# Altium PCB PCB_IOT.PcbDoc
Units mil, origin at the board's own origin, x right, y up, seen from the top; angles counter-clockwise.
Board outline 3937.01 x 3937.01 mil, 2 copper layers (Top Layer, Bottom Layer); 53 components, 41 nets, 184 pads, 0 vias.
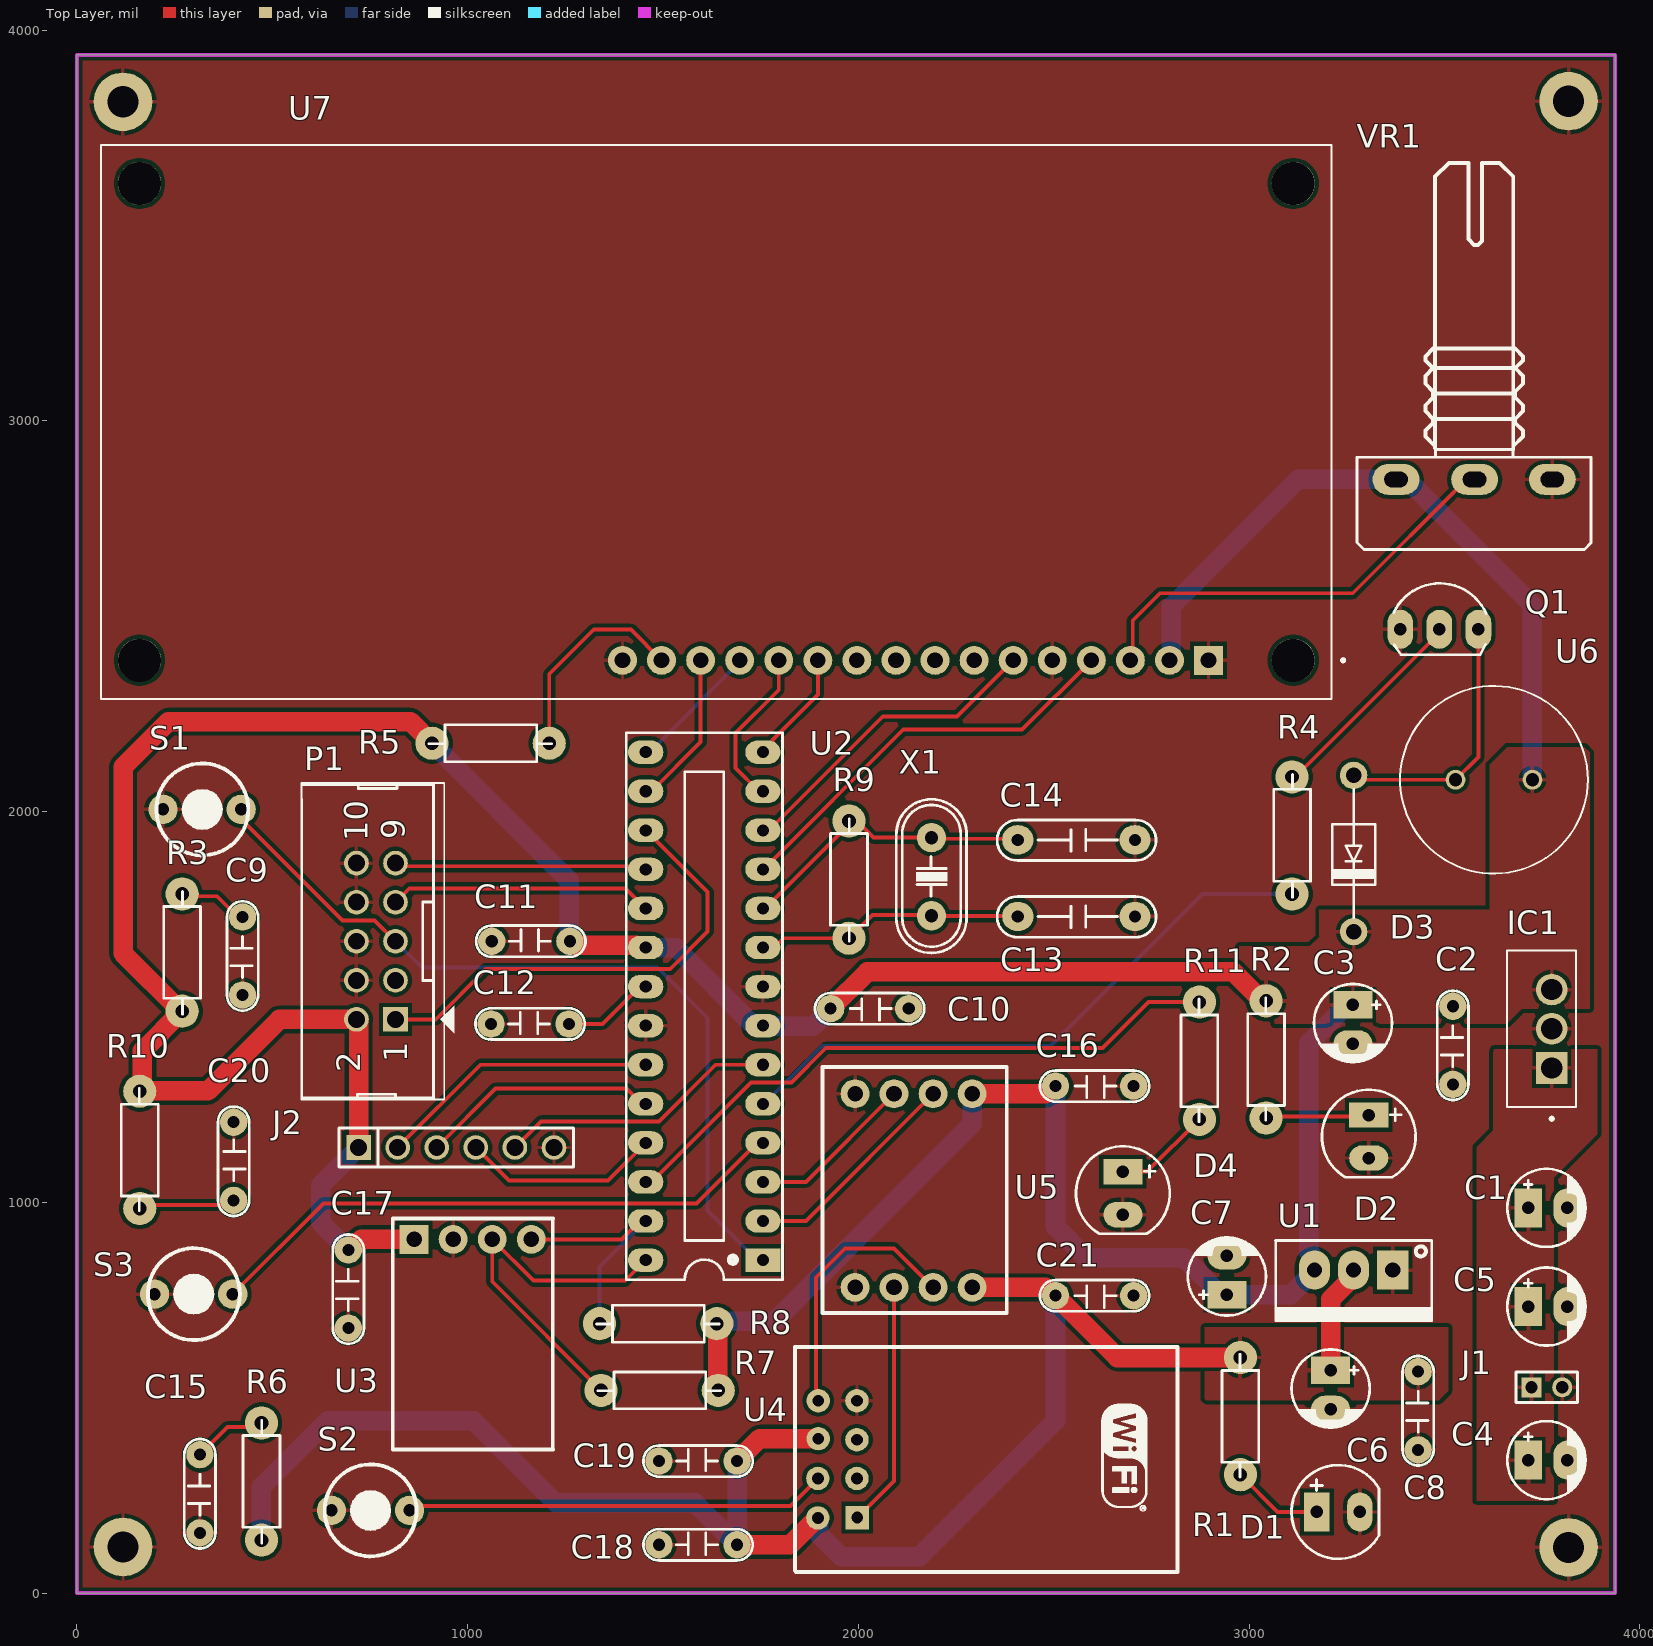
[diagram p0: Top Layer view]
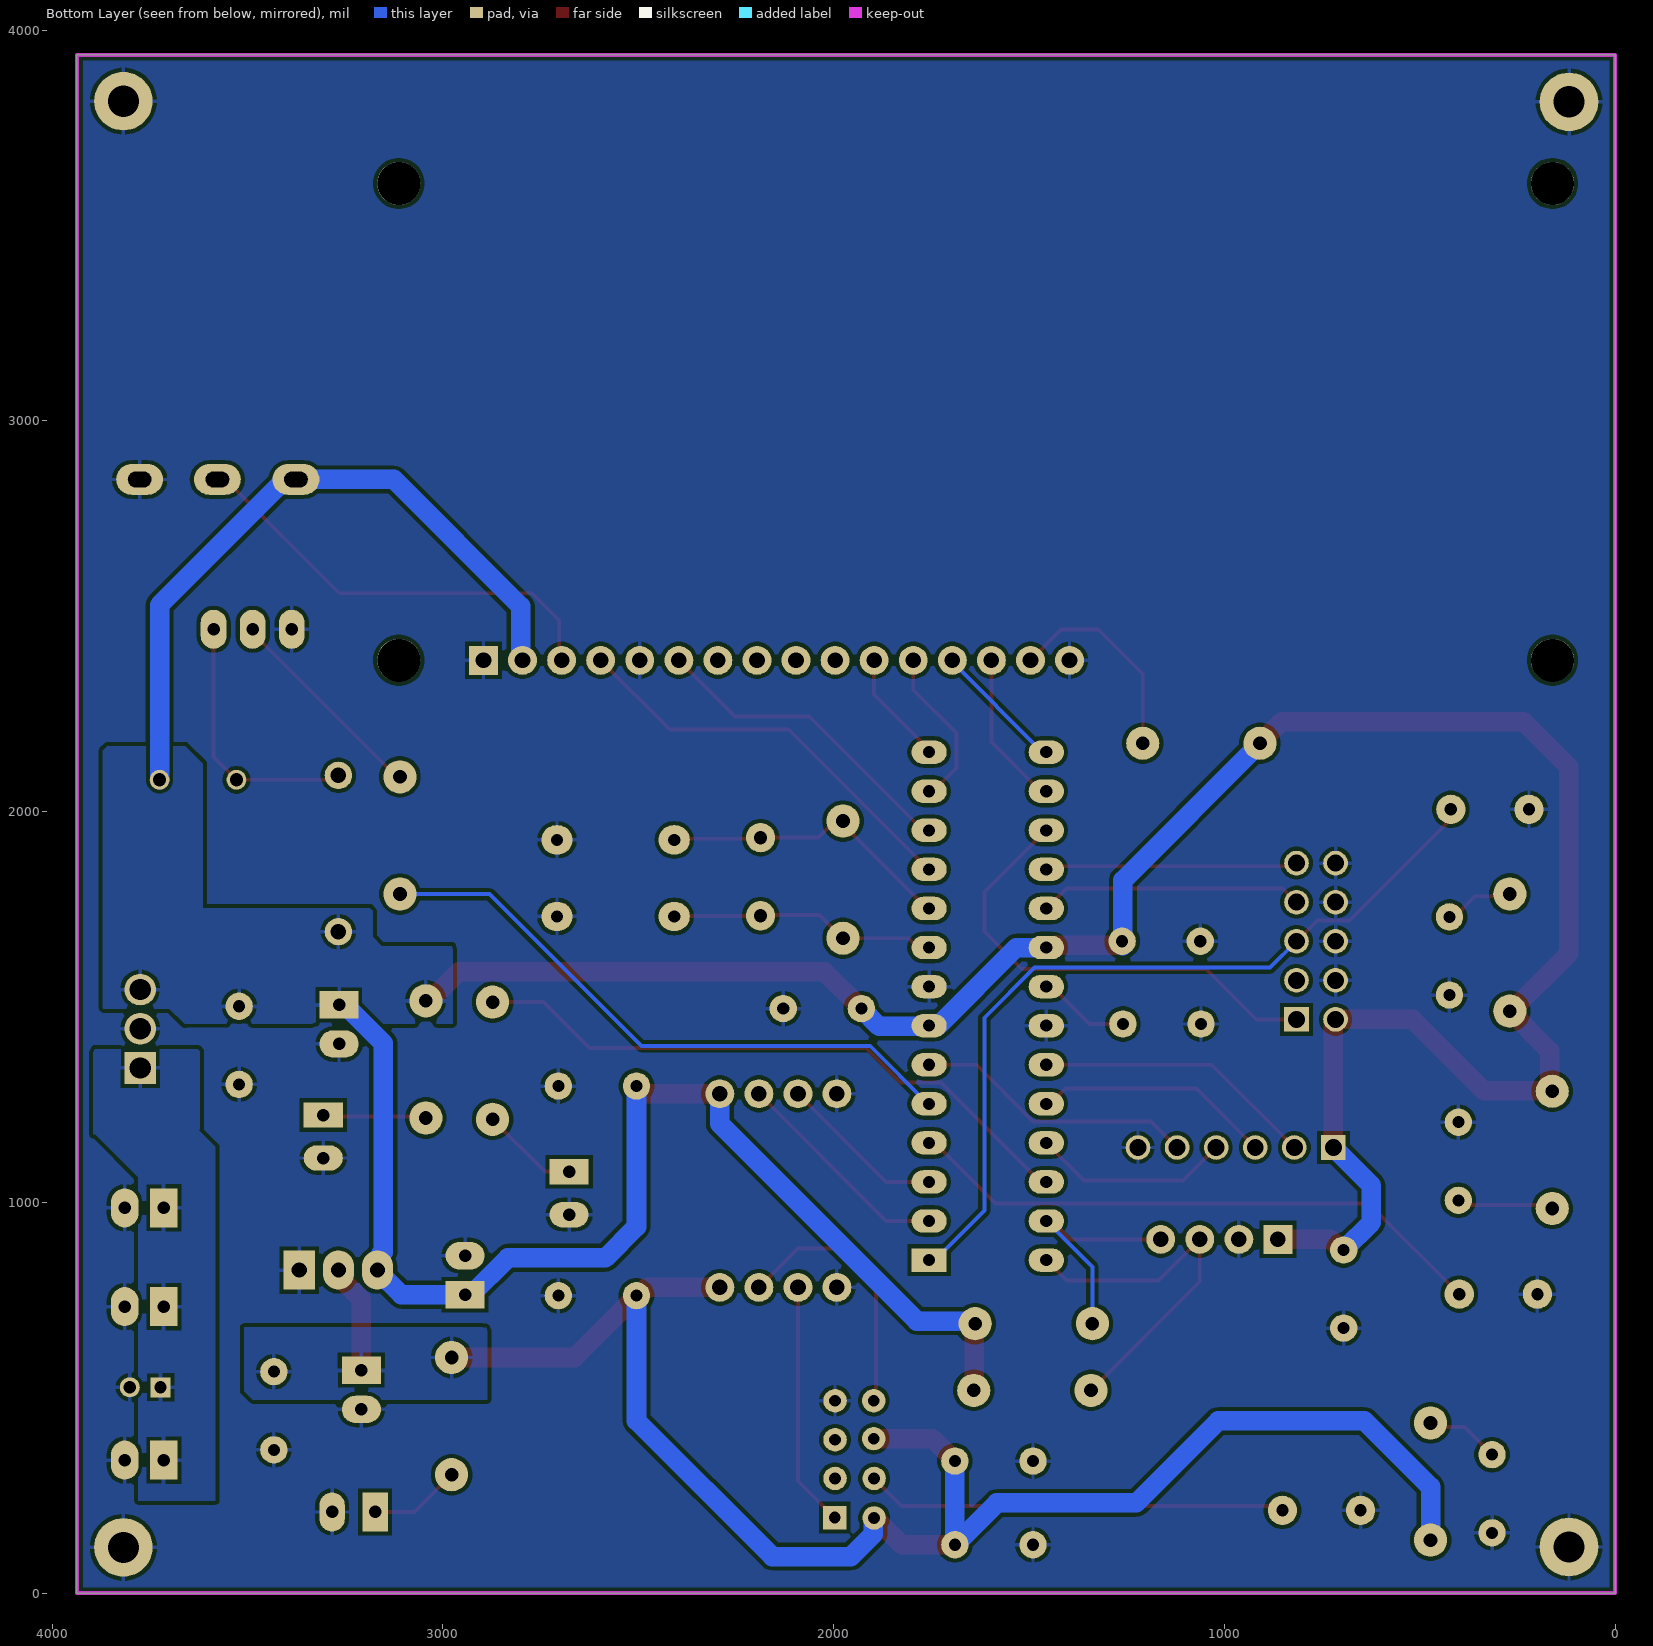
[diagram p1: Bottom Layer view, seen from below]
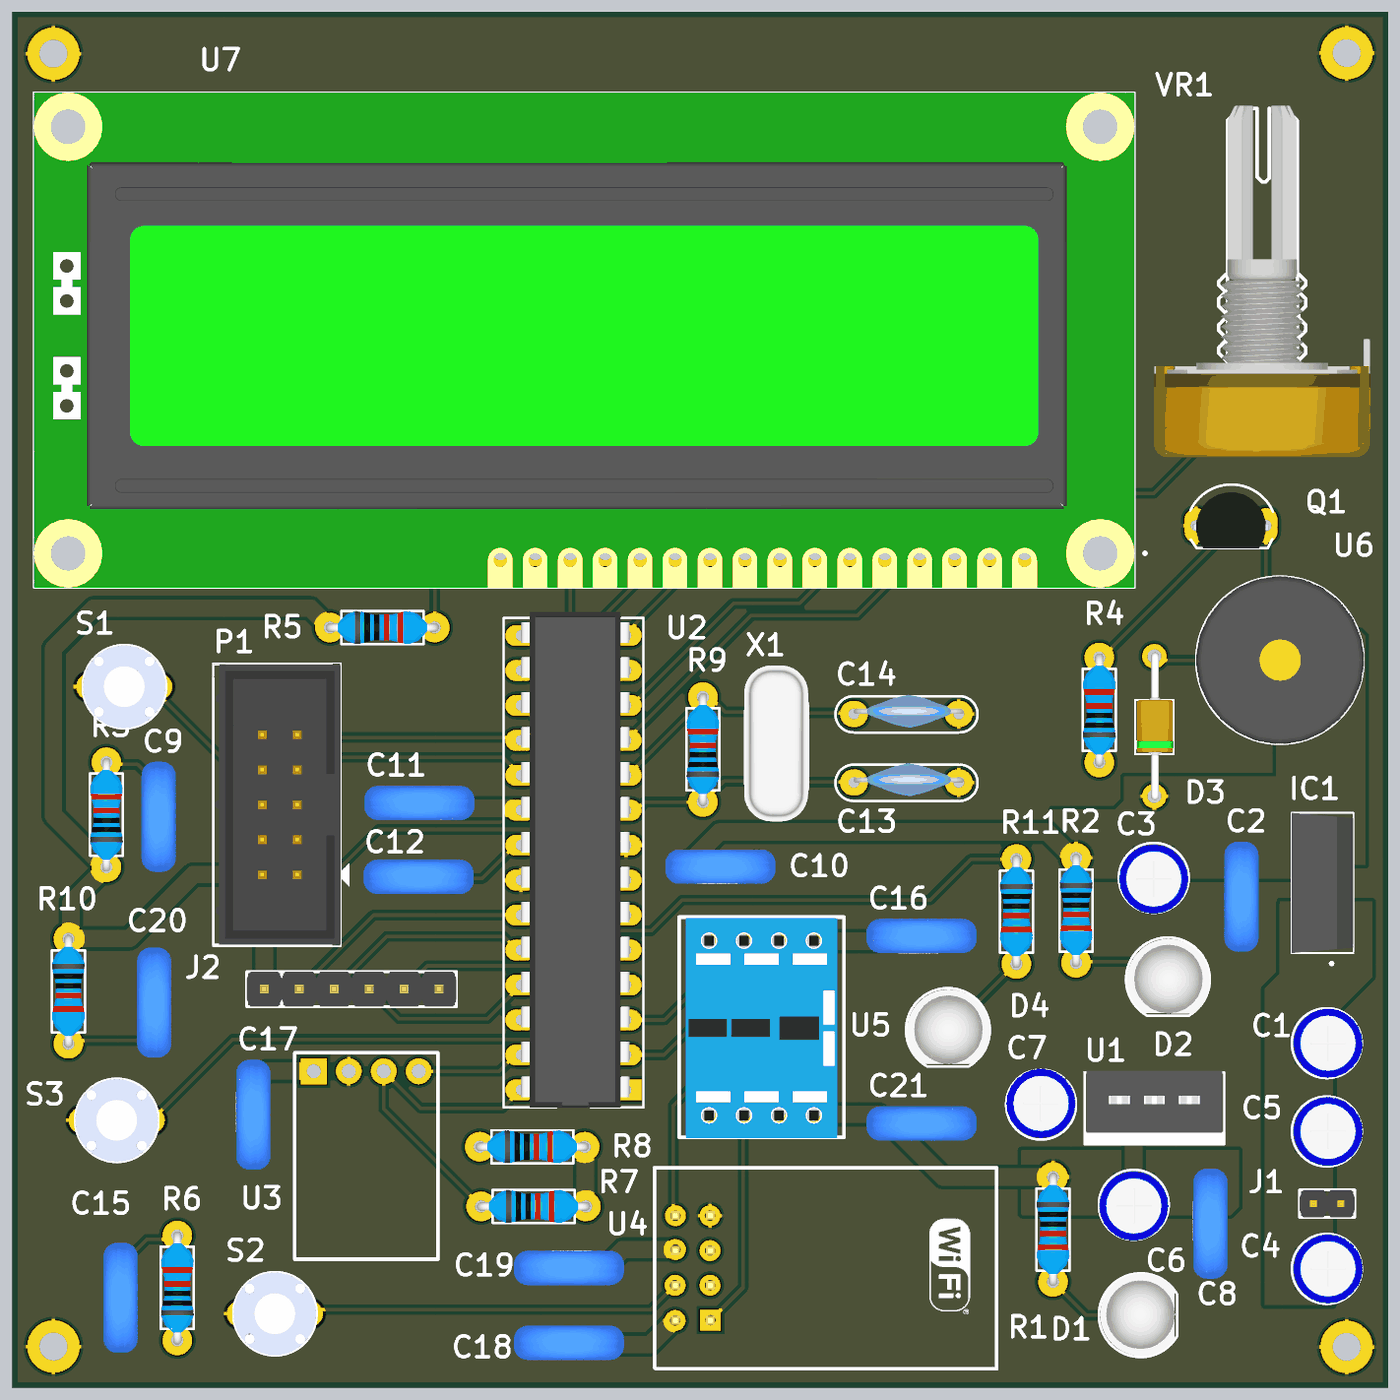
[diagram p2: 3D render of the assembled board from above, using the file's embedded part models]

## Layer stack, top to bottom
Top Solder: solder mask 0.4, Solder Resist, Dk 3.5
Top Layer: signal copper 1.4
Dielectric 1: dielectric 12.6, FR-4, Dk 4.8
Bottom Layer: signal copper 1.4
Bottom Solder: solder mask 0.4, Solder Resist, Dk 3.5

## Board outline
0,3937.01 3937.01,3937.01 3937.01,0 0,0

## Design rules (kind name [scope] priority, off if disabled: settings)
Clearance [All] p1: gap=10 ignorepadtopadclearanceinfootprint=FALSE
PolygonConnect [All] p1: connectstyle=Relief reliefconductorwidth=10 reliefentries=4 polygonreliefangle="90 Angle" airgapwidth=10
RoutingVias [All] p1: holewidth=11.81 width=19.68 viastyle="Through Hole" minholewidth=7.87 minwidth=15.75 maxholewidth=19.68 maxwidth=78.74
SolderMaskExpansion [All] p1: expansion=4 istentingtop=FALSE
SupplyNets "Schematic Supply Nets_3" [InNet('GND')] p1: voltage=0.000
SupplyNets "Schematic Supply Nets_2" [InNet('VIN')] p2: voltage=0.000
SupplyNets "Schematic Supply Nets_1" [InNet('+3.3')] p3: voltage=0.000
SupplyNets "Schematic Supply Nets" [InNet('VCC')] p4: voltage=0.000
UnRoutedNet UnRoutedNet_1 [All] p1: checkbadconnections=TRUE
UnRoutedNet [All] p2: checkbadconnections=TRUE
Width [All] p1: maxlimit=50 minlimit=10 preferedwidth=50 minimp=50.000000 maximp=50.000000 favimp=50.000000
29 further rules are at their usual default settings.

## Classes and differential pairs
component class sensor_wifi: 0 C15 C16 C18 C19 C21 R6 R7 R8 S2 U3 U4 U5
component class power_display: C1 C2 C3 C4 C5 C6 C7 C8 D1 D2 D3 IC1 J1 Q1 R1 R2 R4 R5 U1 U6 U7 VR1
component class MCU: C9 C10 C11 C12 C13 C14 C20 D4 J2 P1 R3 R9 R10 R11 S1 S3 U2 X1

## Components (designator, comment, footprint, x,y, rotation, side; value= is the part's Value field where it differs from the comment)
C1 "22µF/16V" CP1/2 3714.57,986.01 r0 top value=47µF/35V
C2 "0.1uF" CN2 3521.75,1302.01 r90 top
C3 "10µF/16V" CP1/2 3266.09,1505.58 r270 top value=47µF/35V
C4 "47µF/35V" CP1/2 3714.57,340.3 r0 top
C5 "47µF/35V" CP1/2 3714.57,733.37 r0 top
C6 "10µF/16V" CP1/2 3208.86,570.3 r270 top value=47µF/35V
C7 "22µF/16V" CP1/2 2943.52,763.6 r90 top value=47µF/35V
C8 "0.1uF" CN2 3432.81,366.73 r90 top
C9 "0.1uF" CN2 424.07,1530.67 r90 top
C10 "0.1uF" CN2 2129.13,1496.06 r180 top
C11 "0.1uF" CN2 1061.72,1668.44 r0 top
C12 "0.1uF" CN2 1059.84,1456.69 r0 top
C13 "22pF" CN3 2408.17,1731.9 r0 top value=0,047uF
C14 "22pF" CN3 2408.17,1927.82 r0 top value=0,047uF
C15 "0.1uF" CN2 314.96,154.33 r90 top
C16 "0.1uF" CN2 2704.69,1297.79 r180 top
C17 "0.1uF" CN2 694.69,678.23 r90 top
C18 "0.1uF" CN2 1489.78,123.66 r0 top
C19 "0.1uF" CN2 1489.78,337.96 r0 top
C20 "0.1uF" CN2 401.17,1205.29 r270 top
C21 "0.1uF" CN2 2704.69,761.29 r180 top
D1 "GREEN" LED-5TRED 3228.86,207.72 r0 top
D2 "GREEN" LED-5TRED 3306.52,1168.6 r270 top
D3 "Diode" DIO-1A 3267.72,2092.91 r270 top value=1N5007
D4 "GREEN" LED-5TRED 2677.17,1023.62 r270 top
IC1 "L7805" L7805 3750.31,1205.82 r90 top
J1 "12V/1A" J2-D1T 3762.14,526.74 r0 top
J2 "JP6" JP6-D1T 721.07,1140.5 r0 top
P1 "HD 5x2" 61201021621 765.51,1668.44 r90 top
Q1 "2N3904" TO92-123 3487.14,2466.85 r0 top value=C1815
R1 "1k" RES-1/4W-SMALL 2977.93,463.05 r270 top
R2 "1k" RES-1/4W-SMALL 3043.83,1376 r270 top
R3 "10k" RES-1/4W-SMALL 269.44,1629.51 r90 top
R4 "1K" RES-1/4W-SMALL 3110.24,1929.13 r90 top
R5 "220" RES-1/4W-SMALL 1048.99,2175.15 r0 top
R6 "10k" RES-1/4W-SMALL 472.44,275.59 r90 top
R7 "4.7k" RES-1/4W-SMALL 1481.53,518.92 r0 top
R8 "4.7k" RES-1/4W-SMALL 1477.83,689.62 r0 top
R9 "1M" RES-1/4W-SMALL 1976.09,1816.08 r90 top
R10 "10k" RES-1/4W-SMALL 160.86,1144.45 r270 top
R11 "680" RES-1/4W-SMALL 2872.99,1372.63 r270 top
S1 "RESET MCU" "BUTTON  ROUND" 320.52,2005.89 r180 top
S2 "RESET_WIFI" "BUTTON  ROUND" 751.45,211.78 r180 top
S3 "ALARM MUTE" "BUTTON  ROUND" 298.88,765.18 r180 top
U1 "LM1117-3.3V" TO220-123 3367.72,826.77 r180 top
U2 "ATmega328-PU" DIP28 1755.86,852.35 r90 top
U3 "AHT20" AHT20 808.52,958.41 r0 top
U4 "ESP8266 ESP-01" "ESP8266 ESP-01" 1836.57,629.42 r270 top
U5 "LOGIC LEVEL SHIFTER" "I2C LEVEL" 2379.91,716.6 r180 top
U6 "buzzer" buzzer 3663.2,2063.57 r180 top
U7 "LCD" LCD 1730.65,3163.28 r180 top
VR1 "10K" VR-S1 3576.35,2850.3 r180 top value="Volume 50k"
X1 "16MHz" XT2 2187.19,1833.62 r270 top value=32.768kHz

## Footprints (in the part's own frame and the unit in brackets; to place one, negate y for a bottom-side part, rotate by r counter-clockwise, add the part's x,y. Pads: shape width x height; smd on the part's side, far side on the other; paste and mask are expansions set on the pad)
61201021621 [mm] "10 pins, straight, gold plating"
  rect 1.6x1.6 hole 1.1: 1(-5.08,-1.27)
  round 1.6 hole 1.1: 2(-5.08,1.27) 3(-2.54,-1.27) 4(-2.54,1.27) 5(0,-1.27) 6(0,1.27) 7(2.54,-1.27) 8(2.54,1.27) 9(5.08,-1.27) 10(5.08,1.27)
  silkscreen extent -10.29,-5.08 10.29,4.85, body extent -10.18,-4.42 10.18,4.75, height 9.13
AHT20 [mil]
  rect 74x74 / inner round 74 / far side rect 74x74 hole 40: 1(54.47,-52.9)
  round 74 hole 40: 2(154.47,-52.9) 3(254.47,-52.9) 4(354.47,-52.9)
  silkscreen extent 0,-591 410,0
"BUTTON  ROUND" [mm]
  round 1.905 / inner round 1.524 / far side round 1.905 hole 0.8 mask+0.205: 1(-2.54,0) 2(2.54,0)
  silkscreen extent -3,-2.99 2.98,2.99, body extent -3,-3 3,3, height 4.5
buzzer [mm]
  round 1.28 hole 0.85: 1(-1.58,-0.461) 2(3.42,-0.461)
  silkscreen extent -5.18,-6.56 7.02,5.64, body extent -5.2,-6.57 7,5.63, height 6
CN2 [mil]
  round 70 hole 31: 1(0,0) 2(200,0)
  silkscreen extent -40,-40 240,40, body extent -54,-44 260,55, height 407
CN3 [mil] "Cap np W 0.3"
  oval 80x75 hole 31: 1(0,0) 2(300,0)
  silkscreen extent -53,-53 354,51, body extent 0,-39 315,55, height 419
CP1/2 [mil] "Tu hoa < 22uF/16>50V"
  rect 70x100 hole 32: 1(0,0)
  oval 70x100 hole 32: 2(100,0)
  silkscreen extent -53,-100 147,100, body extent -49,-99 149,99, height 287
DIO-1A [mil]
  round 70 hole 40: 1(0,0) 2(400,0)
  silkscreen extent 35,-55 365,55, body extent -11,-50 411,54, height 102
DIP28 [mil] "DIP, 18-Leads, Row Spacing 7.62mm, Pitch 2.54mm, Body 22.8x7.3mm, Window"
  rect 60x90 hole 31: 1(0,0)
  oval 60x90 hole 31: 2(100,0) 3(200,0) 4(300,0) 5(400,0) 6(500,0) 7(600,0) 8(700,0) 9(800,0) 10(900,0) 11(1000,0) 12(1100,0) 13(1200,0) 14(1300,0) 15(1300,300) 16(1200,300) 17(1100,300) 18(1000,300) 19(900,300) 20(800,300) 21(700,300) 22(600,300) 23(500,300) 24(400,300) 25(300,300) 26(200,300) 27(100,300) 28(0,300)
  silkscreen extent -50,-50 1350,350, body extent -50,-10 1367,300, height 200
"ESP8266 ESP-01" [mil] "ESP8266 ESP-01"
  rect 60x60 hole 30: 1(436,161)
  round 60 hole 30: 2(437,60) 3(336,160) 4(336,60) 5(237,160) 6(234,61) 7(137,160) 8(137,61)
  silkscreen extent 0,1 575,980, body extent 1,2 572,978, height 231
"I2C LEVEL" [mil]
  round 74 hole 40: 1(88.43,-65.92) 2(188.43,-65.92) 3(288.43,-65.92) 4(388.15,-65.92) 5(88.43,-561.45) 6(188.43,-561.45) 7(288.43,-561.45) 8(388.15,-561.45)
  silkscreen extent 0,-630 472,0, body extent 20,-628 453,2, height 149
J2-D1T [mm] "2 pins, 1 row, straight, gold plating"
  rect 1.3x1.3 hole 0.8: 1(-1,0)
  round 1.3 hole 0.8: 2(1,0)
  silkscreen extent -2,-1 2,1, body extent -2,-1 2,1, height 6.01
JP6-D1T [mm] "6 pins, 1 row, straight, gold plating"
  rect 1.6x1.6 hole 1.1: 1(0,0)
  round 1.6 hole 1.1: 2(2.54,0) 3(5.08,0) 4(7.62,0) 5(10.16,0) 6(12.7,0)
  silkscreen extent -1.27,-1.27 13.97,1.27, body extent -1.27,-1.27 13.97,1.27, height 8.54
L7805 [mm]
  rect 2.055x2.055 / inner round 2.055 / far side rect 2.055x2.055 hole 1.37: 1(3.511,-0.623)
  round 2.055 hole 1.37: 2(6.061,-0.623) 3(8.611,-0.623)
  silkscreen extent 0.11,-2.21 11.16,2.29, body extent 0.96,-2.21 11.16,2.29, height 20
LCD [mil]
  rect 74x74 / inner round 74 / far side rect 74x74 hole 40: 1(-1165.76,775.85)
  round 74 hole 40: 2(-1065.76,775.85) 3(-965.76,775.85) 4(-865.76,775.85) 5(-765.76,775.85) 6(-665.76,775.85) 7(-565.76,775.85) 8(-465.76,775.85) 9(-365.76,775.85) 10(-265.76,775.85) 11(-165.76,775.85) 12(-65.76,775.85) 13(34.24,775.85) 14(134.24,775.85) 15(234.24,775.85) 16(334.24,775.85)
  round 110.24 hole 110.24 unplated: ""(-1382.29,-444.62) ""(-1382.29,775.85) ""(1570.46,-444.62) ""(1570.46,775.85)
  silkscreen extent -1514,-543 1669,874, body extent -1481,-543 1669,874, height 402
LED-5TRED [mil] "LED 2 PIN, 5 ly , Only colour, pin to pin 110mil"
  rect 65x100 hole 32: 1(-55,0)
  oval 65x100 hole 32: 2(55,0)
  silkscreen extent -120,-120 104,120, body extent -116,-117 98,120, height 339
RES-1/4W-SMALL [mil]
  round 85 hole 35: 1(-140,0) 2(160,0)
  silkscreen extent -148,-47 166,47, body extent -152,-47 172,47, height 97
TO92-123 [mil] "TO-92"
  oval 66x100 hole 32: 1(-100,0) 2(0,0) 3(100,0)
  silkscreen extent -117,-65 120,118, body extent -109,-66 109,95, height 245
TO220-123 [mil] "TO-220 - 1-2-3"
  rect 80x100 hole 39: 1(0,0)
  oval 80x100 hole 39: 2(100,0) 3(200,0)
  silkscreen extent -100,-76 300,130, body extent -95,-80 295,97, height 323
VR-S1 [mil]
  oval 120x78.74 hole 40 slot 60 at 0 deg: 1(-200,0) 2(-1,0) 3(200,0)
  silkscreen extent -299,-810 300,179, body extent -310,-818 310,188, height 839
XT2 [mil] "Footpin for Crystal 2 pin"
  round 75 hole 34: 1(-100,0) 2(100,0)
  silkscreen extent -198,-90 195,90, body extent -233,-93 213,90, height 138

## Part data
C1 C3 C4 C5 C6 C7: library part ID-4, Mfr# #=EEH-ZA1V470P, Design Item ID=ID-4
C2 C8 C9 C10 C11 C12 C15 C16 C17 C18 C19 C20 C21: library part CN2, "Cap np 104 => 105pF"
C13 C14: library part CN3, "Cap np W0.3", Copyright=VanDungEvn
D1 D2 D4: library part ID-23, "Green 569nm LED Indication - Discrete 2.1V 0603 (1608 Metric)", Mfr# #=LTST-C190GKT, Design Item ID=ID-23
D3: "Default Diode", Code - JEDEC=DO-214-AB, Published=8-Jun-2000, Publisher="Altium Limited", Revision="July-2002: Re-released for DXP Platform."
J1: library part ID-36, "2 Position Wire to Board Terminal Block Horizontal with Board 0.200\" (5.08mm) Through Hole", Mfr# #=VI0221520000G, Design Item ID=ID-36
J2: "WR-PHD 2.54 mm Angled Socket Header", Manufacturer="W¨¹rth Elektronik eiSos GmbH", partNo=613006143121, ComponentLink1 Description=Manufacturer, ComponentLink1URL=http://www.we-online.com, ComponentLink2 Description=Datasheet, ComponentLink2URL=http://katalog.we-online.de/em/datasheet/6130xx143121.pdf, Created by="Karrer Zheng", Created Date="29 March 2013", NoPins=06
Q1: library part 2N904, "NPN 600mW, ECB"
R1 R2 R3 R4 R5 R6 R7 R8 R9 R10 R11: library part RES-SMD
S1 S2 S3: library part SW-Button, "Switch-Button", LatestRevisionDate=17-Jul-2002, LatestRevisionNote="Re-released for DXP Platform.", PackageReference=SPST-2, Published=24-Mar-1999, Publisher="Altium Limited"
U1: library part LM1117, "Low-Dropout Linear Regulator", Creator="Nguyen Ba Bien", Website=http://group3i.net
U2: "8-bit AVR Microcontroller, 32KB Flash, 1KB EEPROM, 2KB SRAM, 28-pin PDIP, Industrial Grade (-40°C to 85°C)", Supplier Part Number 1=ATMEGA328-PU-ND, ComponentLink1Description="Manufacturer Link", ComponentLink1URL=http://www.atmel.com/products/avr/default.asp?, ComponentLink2Description="ATmega48A/48PA/88A/88PA/168A/168PA/328/328P Datasheet", ComponentLink2URL=http://www.atmel.com/dyn/resources/prod_documents/8271.pdf, ComponentLink3Description="ATmega48A/48PA/88A/88PA/168A/168PA/328/328P Summary", ComponentLink3URL=http://www.atmel.com/dyn/resources/prod_documents/8271S.pdf, ComponentLink4Description="Atmel.com Home", ComponentLink4URL=http://www.atmel.com, DatasheetVersion="revA, Jan-2010", PackageDescription="28-lead (0.300\"/7.62mm Wide) Plastic Dual Inline Package (PDIP)", PackageReference=28P3, PackageVersion="revB, Sep-2001", Published=1-Apr-2010, Publisher="Altium Limited", Supplier 1=Digi-Key, Supplier 2=Mouser, Supplier Part Number 2=556-ATMEGA328-PU
U3: library part ATH20
U5: library part "i2c level"
VR1: library part VR-S, "Var Resistor"
X1: library part "CRYSTAL 2PIN", Part Number=ABS07-120-32.768KHZ-T

## Free pads (board coordinates)
  round 150 hole 80: 29(117.9,3816.89) 30(3817.96,3818.49) 31(3817.9,117.05) 32(118.11,118.11)

## Nets (pads, with @x,y where several pads share a name; then routed paths per layer and width w, separated by ;. In a path a pad name is that pad's centre, name@x,y a point inside that pad or via, vN(x,y) a via of type N, cw(c..) or ccw(c..) an arc to the next point about the centre after c; other vN are vias at no path point)
+3.3: C6.1 C8.2 C18.2 C19.2 C21.2 R1.1 R6.1 U1.2 U4.2 U4.6 U5.1 | length 4407.7
  Top Layer w50: C18.2 1825.11,123.66 1893.87,192.42 U4.2 ; C19.2 1747.42,395.6 U4.6@1895,395.6 ; U5.1 2478.05,782.52 2499.17,761.4 C21.2@2500.68,761.4 ; C21.2 2662.93,603.05 R1.1 ; C6.1 3208.86,751.85 3267.72,810.71 U1.2
  Bottom Layer w50: R6.1 472.44,271.61 641.73,440.9 1015.79,440.9 1225.61,231.08 1582.36,231.08 C18.2 C19.2 ; U4.2 1898.49,190.51 1898.49,150.87 1955.94,93.41 2156.95,93.41 2504.69,441.16 C21.2
A: R5.2 U7.15 | length 544.1
  Top Layer w10: R5.2 1208.99,2352.06 1322.98,2466.06 1417.77,2466.06 U7.15
AREF: C12.2 U2.21 | length 235.6
  Top Layer w10: C12.2 1345.21,1456.69 1440.86,1552.35 U2.21
DB4: U2.14 U7.11 | length 294.2
  Top Layer w10: U2.14 1757.33,2152.35 1780.43,2175.44 1780.43,2183.72 1896.41,2299.7 U7.11
DB5: U2.13 U7.12 | length 416
  Top Layer w10: U2.13 1745.16,2052.35 1686.03,2111.47 1686.03,2201.42 1796.41,2311.8 U7.12
DB6: U2.15 U7.13 | length 339.8
  Bottom Layer w10: U2.15@1454.99,2156.63 1470.37,2156.63 1696.41,2382.66 U7.13
DB7: U2.16 U7.14 | length 402.1
  Top Layer w10: U2.16 1470.86,2052.35 1596.41,2177.89 U7.14
E: U2.12 U7.6 | length 820.8
  Top Layer w10: U2.12 1770.71,1952.35 2062.49,2244.12 2253.1,2244.12 U7.6
GND: C1.2 C2.1 C3.2 C4.2 C5.2 C6.2 C7.2 C8.1 C9.1 C10.1 C11.1 C12.1 C13.2 C14.2 C15.1 C16.1 C17.1 C18.1 C19.1 C20.1 C21.1 D1.2 D2.2 D4.2 IC1.2 J1.2 J2.6 P1.4 P1.6 P1.8 P1.10 pad.29 pad.30 pad.31 pad.32 Q1.1 S1.2 S2.2 S3.2 U1.1 U2.8 U2.22 U3.2 U4.7 U5.4 U5.8 U7.1 U7.5 U7.16 VR1.1
MISO: P1.9 U2.18 | length 647
  Top Layer w10: P1.9 823.56,1860.39 1447.81,1860.39 U2.18
MOSI: P1.1 U2.17 | length 1217.5
  Top Layer w10: P1.1 918.5,1468.44 1047.41,1597.35 1518.61,1597.35 1614.17,1692.91 1614.17,1794.03 1480.43,1927.78 1480.43,1929.25 1457.33,1952.35 U2.17
NetC9_2: C9.2 R3.2 | length 179.2
  Top Layer w10: R3.2 275.38,1783.57 358.15,1783.57 C9.2@420.42,1721.31
NetC15_2: C15.2 R6.2 | length 191.1
  Top Layer w10: C15.2 385.59,424.96 461.81,424.96 R6.2
NetC20_2: C20.2 R10.2 | length 259
  Top Layer w10: R10.2 169.71,993.3 372.94,993.3 388.94,1009.3 C20.2@397.05,1009.3 ; C20.2@399.87,993.86 C20.2@412.35,993.86
NetD1_1: D1.1 R1.2 | length 235.4
  Top Layer w10: R1.2 3073.26,207.72 D1.1
NetD2_1: D2.1 R2.2 | length 244.2
  Top Layer w10: R2.2 3047.25,1219.42 3267.66,1219.42 D2.1@3281.08,1232.84
NetD3_1: D3.1 Q1.3 U6.2 | length 674.7
  Top Layer w10: D3.1 3278.82,2081.81 U6.2@3528.46,2081.81 ; U6.2 3587.14,2140.3 Q1.3
NetD4_1: D4.1 R11.2 | length 251.3
  Top Layer w10: D4.1 2738.98,1078.62 R11.2
NetQ1_2: Q1.2 R4.2 | length 538.6
  Top Layer w10: R4.2 3118.33,2089.13 3487.14,2457.95 Q1.2
PC0: J2.2 U2.23 | length 722.5
  Top Layer w10: J2.2 1032.91,1352.35 U2.23
PC1: J2.3 U2.24 | length 613.3
  Top Layer w10: J2.3 1071.72,1291.16 1407.17,1291.16 1445.98,1252.35 U2.24
PC2: J2.4 U2.25 | length 509.7
  Top Layer w10: J2.4 1105.56,1056 1359.52,1056 U2.25
PC3: R11.1 U2.26 | length 1607.8
  Top Layer w10: U2.26 1470.86,1052.35 1725.86,1307.35 1828.77,1307.35 1916.72,1395.29 2625.14,1395.29 2742.48,1512.63 R11.1
PC4: R8.1 U2.27 U3.4 | length 624.7
  Top Layer w10: U3.4 1394.02,905.51 1440.86,952.35 U2.27
  Bottom Layer w10: R8.1 1337.83,834.31 1431.29,927.78 1431.29,929.25 1454.39,952.35 U2.27
PC5: R7.1 U2.28 U3.3 | length 960.2
  Top Layer w10: R7.1 1062.99,797.46 U3.3 1168.49,800.01 1403.52,800.01 U2.28
PD0: U2.2 U5.6 | length 570.5
  Top Layer w10: U2.2 1865.78,952.35 U5.6
PD1: U2.3 U5.7 | length 429.1
  Top Layer w10: U2.3 1865.78,1052.35 U5.7
PD2: S3.1 U2.4 | length 1517.3
  Top Layer w10: S3.1 631.04,997.35 1585.86,997.35 1740.86,1152.35 U2.4
PD3: R4.1 U2.5 | length 1576.7
  Bottom Layer w10: U2.5 1758.69,1252.35 1906.4,1400.06 2492.23,1400.06 2881.3,1789.13 R4.1
PD4: J2.5 U2.6 | length 722.5
  Top Layer w10: J2.5 1187.91,1207.35 1489.5,1207.35 1634.5,1352.35 U2.6
PD5: U2.11 U7.4 | length 1062.2
  Top Layer w10: U2.11 1757.59,1852.35 2115.12,2209.87 2418.85,2209.87 U7.4
RESET: P1.5 S1.1 U2.1 | length 2116.9
  Top Layer w10: S1.1 432.96,1993.45 432.96,1968.62 679.64,1721.94 762.01,1721.94 P1.5
  Bottom Layer w10: P1.5 882.88,1601.07 1485.78,1601.07 1614.17,1472.67 1614.17,979.03 1740.86,852.35 U2.1
RESET8266: S2.1 U4.4 | length 1078.9
  Top Layer w10: S2.1 863.01,223.35 1826.5,223.35 U4.4
RXD: U4.1 U5.3 | length 629.9
  Top Layer w10: U4.1@1995.11,194.71 1998.86,194.71 2091.49,287.33 U5.3
SCK: P1.7 U2.19 | length 676.1
  Top Layer w10: P1.7 850.65,1803.57 1404.63,1803.57 U2.19
TXD: U4.8 U5.2 | length 690.5
  Top Layer w10: U4.8 1891.38,498.61 1891.38,808.14 1965.61,882.36 2091.65,882.36 U5.2
VCC: C2.2 C3.1 C7.1 C10.2 C11.2 C16.2 C17.2 D3.2 IC1.3 J2.1 P1.2 R2.1 R3.1 R5.1 R7.2 R8.2 R10.1 U1.3 U2.7 U2.20 U3.1 U5.5 U6.1 U7.2 VR1.3 | length 10833.2
  Top Layer w50: R10.1 167.56,1291.15 167.56,1387.62 R3.1 ; R10.1@161.81,1285.4 335.19,1285.4 518.22,1468.44 P1.2 715.51,1464.92 721.07,1459.37 J2.1 ; R3.1@265.86,1489.51 118.11,1637.26 118.11,2114.4 234.5,2230.79 853.36,2230.79 R5.1 ; C17.2 700.1,878.23 728.12,906.25 U3.1@862.25,906.25 ; C11.2 1267.13,1668.44 1277.35,1658.22 1432.28,1658.22 1438.15,1652.35 U2.20 ; R8.2 1639.68,687.77 1639.68,520.77 R7.2 ; U2.7@1753.41,1454.26 U2.7@1755.76,1451.9 ; C10.2 2023.2,1590.13 2960.23,1590.13 3034.36,1516 R2.1 ; U5.5 2479.54,1278.05 2499.28,1297.79 C16.2
  Bottom Layer w50: C17.2 623.82,949.1 623.82,1043.26 J2.1 ; R5.1 1259.84,1824.3 C11.2@1259.84,1656.91 ; U2.20 1532.71,1652.35 1730.8,1454.26 1736.24,1454.26 1737.52,1452.98 U2.7@1737.52,1449.15 ; R8.2 1644.52,696.31 1786.94,696.31 2291.49,1200.86 U5.5 ; U2.7@1757.66,1450.54 1883.61,1450.54 C10.2 ; C16.2 2504.69,938.15 2584.59,858.26 2833.86,858.26 2928.52,763.6 C7.1 3106.43,763.6 3165.09,822.27 U1.3@3167.83,822.27 ; U7.2 2801,2392.02 2801,2525.41 3125.89,2850.3 VR1.3 ; U1.3 3161.98,832.51 3161.98,863.72 3152.96,872.74 3152.96,1407.45 3251.09,1505.58 C3.1 ; VR1.3@3395.51,2844.55 3409.5,2844.55 3725.4,2528.64 U6.1
VIN: C1.1 C4.1 C5.1 IC1.1 J1.1
VO: U7.3 VR1.2 | length 1129.1
  Top Layer w10: U7.3 2702.51,2393.53 2702.51,2489.78 2771.79,2559.06 3265.48,2559.06 3556.72,2850.3 VR1.2
XTAL1: C13.1 R9.1 U2.9 X1.2 | length 689
  Top Layer w10: U2.9 1784.39,1652.35 1808.12,1676.08 R9.1 2035.83,1735.82 2184.98,1735.82 X1.2@2188.43,1732.37 ; X1.2@2188.04,1732.76 2407.31,1732.76 C13.1
XTAL2: C14.1 R9.2 U2.10 X1.1 | length 770.4
  Top Layer w10: U2.10 1761.61,1752.35 1976.09,1966.83 R9.2 1996.39,1976.08 2038.85,1933.62 X1.1 2190.08,1930.72 2405.27,1930.72 C14.1
pads on no net: P1.3 U4.3 U4.5 U7. U7.7 U7.8 U7.9 U7.10

## Polygon pours and split planes (outlines as drawn)
GND on Top Layer "GND_L02_P-001" (solid, pour order 6): 0,3937.01 3937.01,3937.01 3937.01,0 3932.8,4.21 -3.94,4.21 -3.94,3933.07
VCC on Top Layer "GND_L02_P-001" (solid, pour order 4): 3180.36,1750.92 3180.36,1680.7 3180.76,1680.29 3155.74,1655.27 2975.33,1655.27 2975.33,1454.48 2977.97,1457.12 3659.95,1457.12 3698.56,1495.74 3871.77,1495.74 3871.77,2151.85 3858.27,2165.35 3661.42,2165.35 3615.91,2119.85 3615.91,1749.6 3180.89,1749.6 3180.31,1749.02
+3.3 on Top Layer "GND_L02_P-001" (solid, pour order 3): 2886.93,679.99 2887.1,680.16 3509.85,680.16 3509.85,517.72 3487.29,495.16 3487.29,493.87 2890.15,493.87 2886.33,497.68 2886.33,682.36
VIN on Top Layer "GND_L02_P-001" (solid, pour order 0): 3625.57,1393.84 3627.56,1391.85 3891.02,1391.85 3891.02,1174.49 3779.53,1062.99 3779.53,236.22 3582.68,236.22 3582.68,1141.73 3625.14,1184.2 3625.14,1393.04
GND on Bottom Layer "GND_L02_P-001" (solid, pour order 7): 0,3937.01 3937.01,3937.01 3937.01,0 0,0
VCC on Bottom Layer "GND_L02_P-001" (solid, pour order 5): 2976.57,1656.15 2975.33,1654.92 2975.33,1457.82 3660.29,1457.82 3661.42,1456.69 3700.79,1496.06 3869.18,1496.06 3870.8,1497.68 3870.8,2156.13 3858.55,2168.38 3858.22,2168.05 3659.88,2168.05 3614.51,2122.68 3614.51,1753.49 3187.04,1753.49 3185.05,1755.47 3180.09,1750.51 3180.09,1679.32 3156.25,1655.48 3155.58,1656.14 2977.11,1656.14
+3.3 on Bottom Layer "GND_L02_P-001" (solid, pour order 2): 2889.87,678.92 2891.06,680.11 3509.14,680.11 3509.14,517.01 3487.31,495.19 2886.68,495.19 2886.68,681.55 2887.52,682.38
VIN on Bottom Layer "GND_L02_P-001" (solid, pour order 1): 3627.82,1392.03 3891.09,1392.03 3891.15,1392.09 3895.03,1388.2 3895.03,1173.89 3889.61,1173.89 3779.53,1063.8 3779.53,236.22 3582.68,236.22 3582.68,1142.03 3625.25,1184.6 3622.05,1187.8 3622.05,1386.3 3627.67,1391.92

## Keep-outs
Keep-Out Layer:
  the board outline again, w10

## Text inside footprints (layer, text, board x,y; h text height)
P1: Top Overlay "1" at 845.04,1359.18 h60 r90; Top Overlay "2" at 725.51,1333.44 h60 r90; Top Overlay "9" at 839.51,1929.44 h60 r90; Top Overlay "10" at 744.51,1924.44 h60 r90
U4: Mechanical 13 "ANTENNA AREA" at 2795.17,619.38 h10 r270; Mechanical 13 "CUTOUT POLYGON" at 2775.17,619.38 h10 r270